# Altium PCB EMG_MainBoard_Layout.PcbDoc (part 6 of 7)
Units mm, origin at the board's own origin, x right, y up, seen from the top; angles counter-clockwise.
Board outline 59.1 x 36 mm, 6 copper layers (L1 TOP, L2 GND, L3 SIGNAL, L4 GND, L5 POWER SIGNAL, L6 BOTTOM), stack 1.146 mm thick; 231 components, 136 nets, 812 pads, 470 vias.
Unrouted connection lines stored in the file: 570.
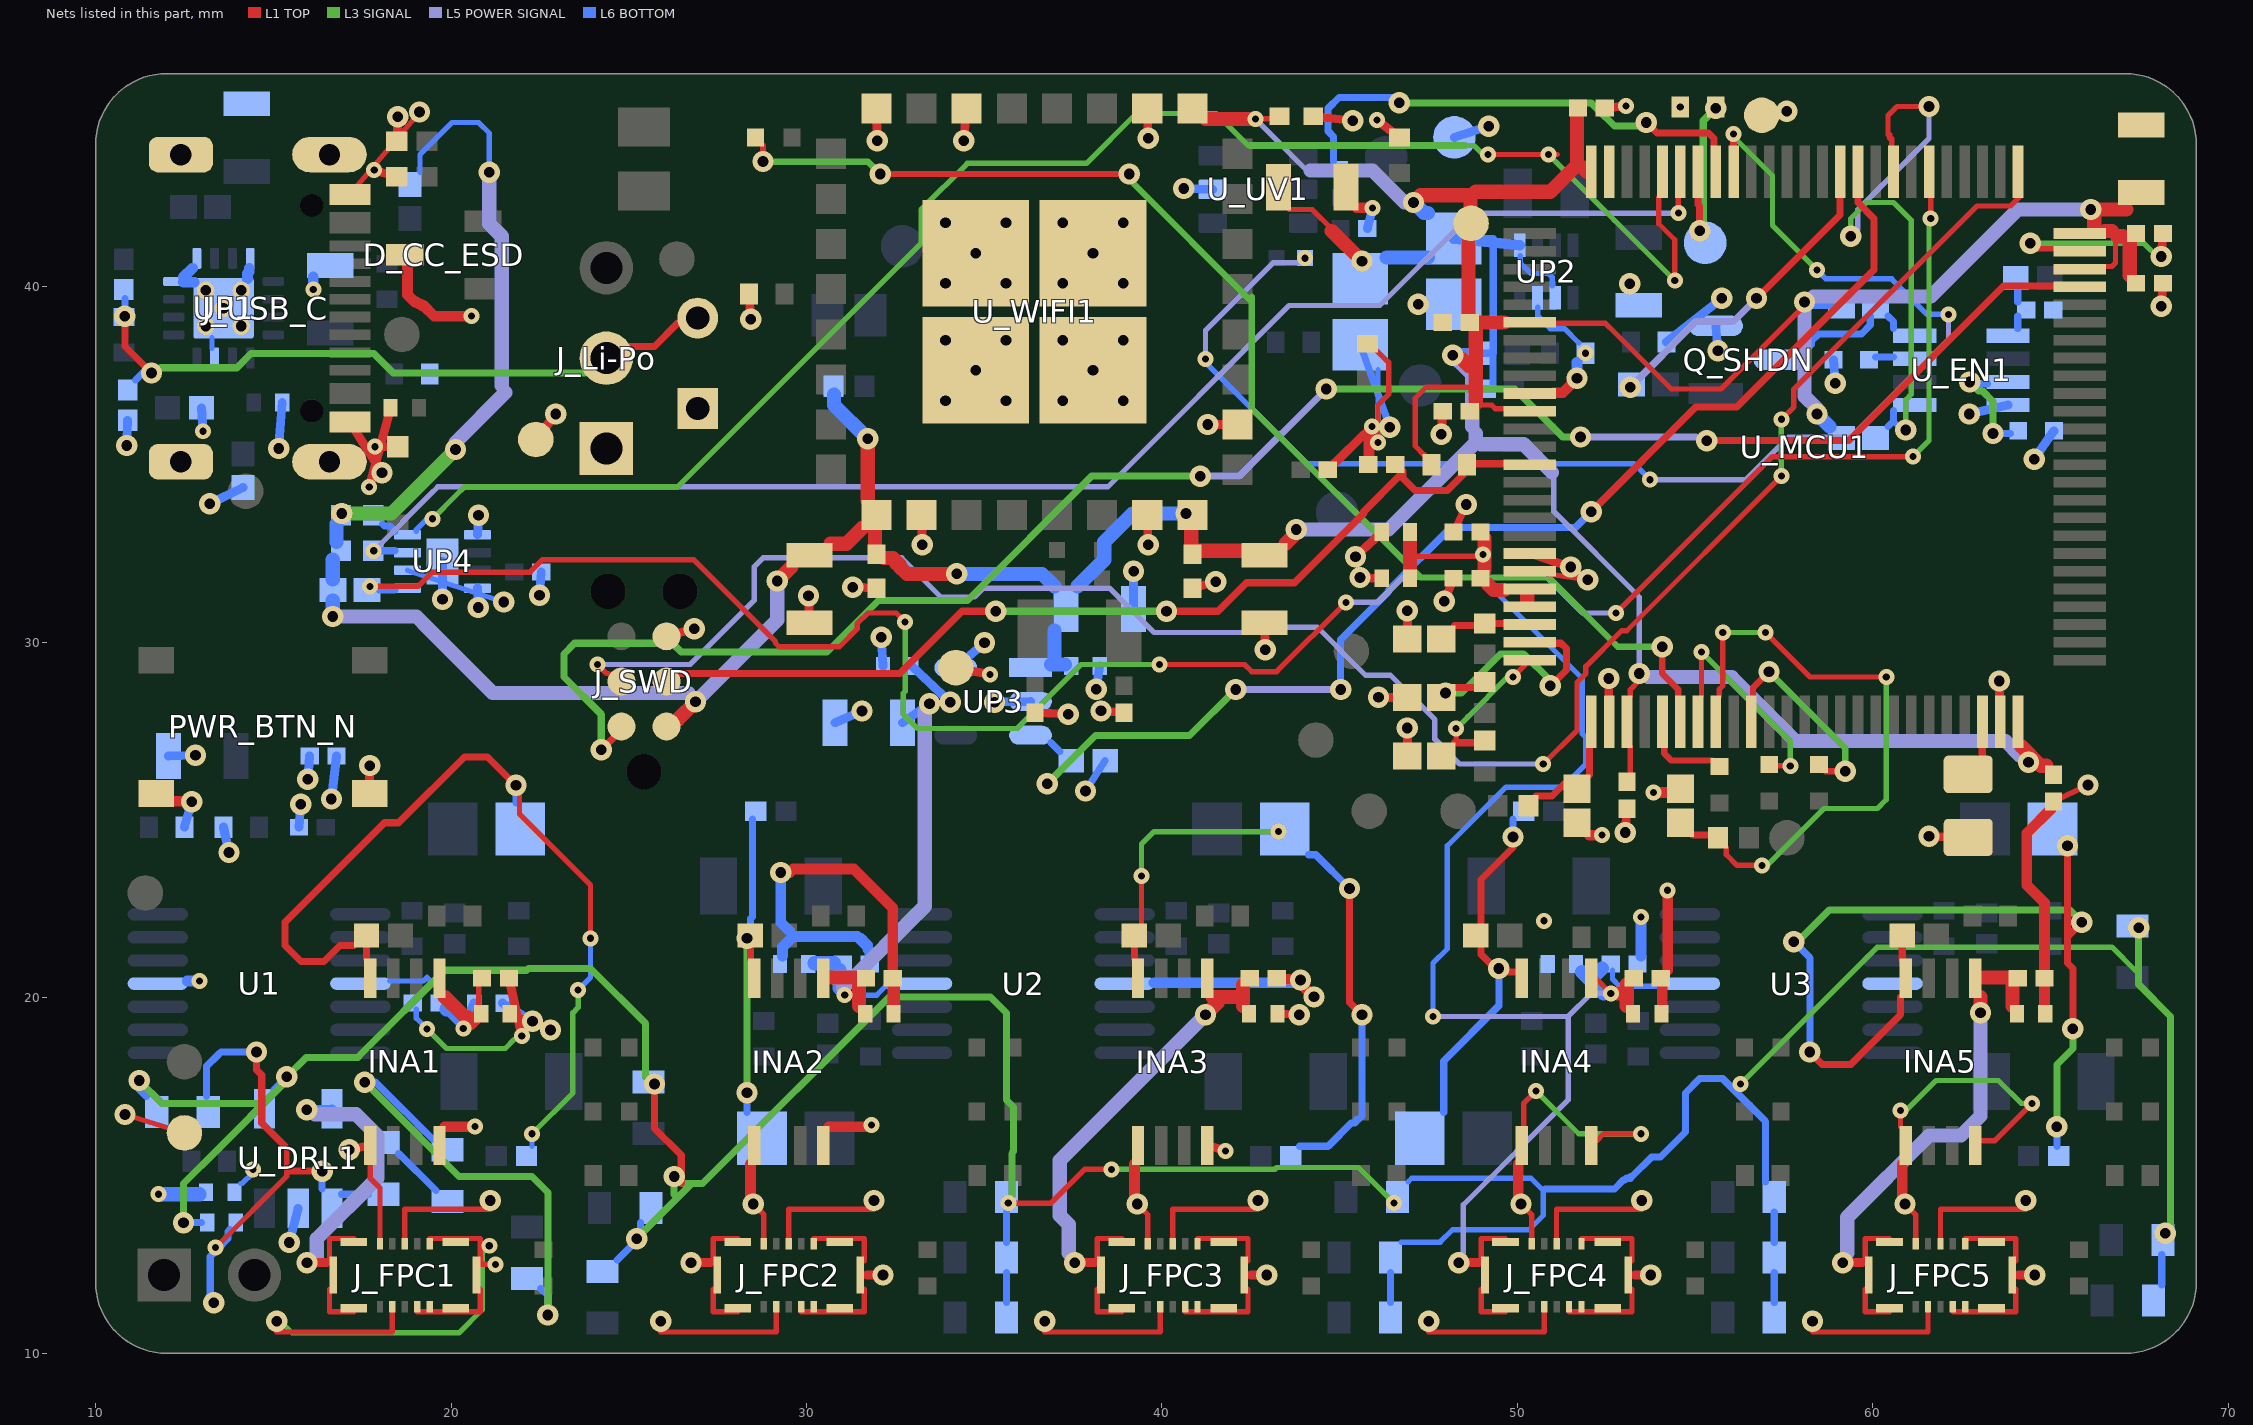
[diagram p7: the nets of this part, all layers, seen from the top]

## Via types
v1: diameter 0.6, hole 0.3, L1 TOP to L6 BOTTOM, 327 vias
v2: diameter 0.45, hole 0.2, L1 TOP to L6 BOTTOM, 138 vias
v3: diameter 0.5, hole 0.3, L1 TOP to L6 BOTTOM, 5 vias

## Nets (pads, with @x,y where several pads share a name; then routed paths per layer and width w, separated by ;. In a path a pad name is that pad's centre, name@x,y a point inside that pad or via, vN(x,y) a via of type N, cw(c..) or ccw(c..) an arc to the next point about the centre after c; other vN are vias at no path point) (continued)
DRL_SUM: (continued)
  L6 BOTTOM w0.15: R_DRL_VB3.2@46.725,13.125 47.825,13.125 48.175,13.475 50.325,13.475 50.725,13.875 50.725,14.575 50.375,14.925 47.025,14.925 R_DRL_VC3.2@46.925,14.825 ; v2@56.175,17.475 v2(56.275,17.575)
  L6 BOTTOM w0.2: v1(11.225,17.675) 11.225,17.425 R_DRL_FB.1@11.425,17.225 ; v1(12.475,13.675) C_DRL_FB.1@12.975,13.675 ; U_DRL1.4@15.025,17.425 v1(15.375,17.775) ; R_DRL_VA1.2@24.675,12.625 25.325,13.275 R_DRL_VB1.2@25.325,13.675 ; R_DRL_VA2.2@35.625,11.425 R_DRL_VB2.2@35.625,12.275 ; R_DRL_VB2.2@35.625,13.125 R_DRL_VC2.2@35.625,13.975 ; R_DRL_VA3.2@46.425,11.425 R_DRL_VB3.2@46.425,12.275 ; 50.775,14.625 52.725,14.625 52.975,14.875 53.025,14.875 53.075,14.925 53.175,14.925 53.175,14.975 53.225,14.975 53.775,15.525 54.025,15.525 54.725,16.225 54.725,17.325 55.125,17.725 55.775,17.725 56.975,16.525 R_DRL_VC4.2@56.975,14.825 ; R_DRL_VA4.2@57.225,11.425 R_DRL_VB4.2@57.225,12.275 ; R_DRL_VB4.2@57.225,13.125 R_DRL_VC4.2@57.225,13.975 ; R_DRL_VA5.2@68.125,11.925 R_DRL_VB5.2@68.125,12.775
FG_ALRT: R_AL.1 U_MCU1.81 UP4.5 | length 60.3
  L1 TOP w0.15: v2(17.725,31.575) 19.075,31.575 19.475,31.975 22.125,31.975 22.225,31.975 22.575,32.325 26.825,32.325 29.125,30.025 29.125,29.975 29.225,29.875 30.925,29.875 31.425,30.375 31.425,30.525 31.725,30.825 32.525,30.825 v2(32.775,30.575) ; v2(39.925,29.375) 42.325,29.375 42.525,29.175 43.225,29.175 v2(45.175,31.125) ; v2(52.775,30.825) 57.175,35.225 v2(61.125,35.225) ; v2(61.625,41.925) U_MCU1.81@61.625,42.525
  L3 SIGNAL w0.15: v2(32.775,30.575) 32.775,28.625 32.725,28.575 32.725,27.975 33.125,27.575 35.925,27.575 37.725,29.375 v2(39.925,29.375) ; v2(61.125,35.225) 61.575,35.675 61.575,41.875 v2(61.625,41.925)
  L5 POWER SIGNAL w0.15: v2(45.175,31.125) 46.075,31.125 46.775,31.825 48.605,31.825 50.825,31.825 51.825,30.825 v2(52.775,30.825)
  L6 BOTTOM w0.2: R_AL.1@17.975,31.475 UP4.5@18.425,31.475
GND: C1_EN1.1 C1_MCU.2 C2_EN1.2 C2_MCU.1 C3_EN1.1 C3_MCU.2 C4_MCU.1 C_ADC1.2 C_ADC2.2 C_ADC3.2 C_ADC4.2 C_ADC5.2 C_BAT.2 C_DRL_DEC.2 C_IN_.2 C_MCU_BULK.2 C_MCU_VDD1.1 C_MCU_VDD2.1 C_MCU_VDD3.1 C_MCU_VDD4.2 C_MCU_VDD5.2 C_NRST.2 C_OUT_.2 C_UV_BYPASS.2 C_VBAT.1 C_VBUS.1 C_VDDUSB.2 C_WIFI_BULK.1 C_WIFI_EN.2 C_WIFI_VDD33.2 C_WIFI_VDD33_HF.2 C_WIFI_VDDIO1.1 C_WIFI_VDDIO1_HF.2 C_WIFI_VDDIO2.1 C_WIFI_VDDIO2_HF.1 C_WIFI_X32_IN.1 C_WIFI_X32_OUT.1 CCU1.2 CCU2.1 CCU3.1 CCU4.2 CCU5.1 CCU6.2 CCU7.1 CCU8.2 CCU9.1 CCU10.2 Cdiv.1 Cdiv_1.1 Cdiv_10uF.1 CU6_1.1 CU_11.1 CU_12.1 CU_14.1 CU_21.2 CU_22.2 CU_24.2 CUP4.2 CUP4_1.2 CUP5_1.2 CUP5_2.1 CUP5_3.1 CUP5_5.2 D_CC_ESD.3 D_VBUS.2 INA1.1 INA1.4 INA2.1 INA2.4 INA3.1 INA3.4 INA4.1 INA4.4 INA5.1 INA5.4 J_FPC1.1 J_FPC1.3 J_FPC1.5 J_FPC1.7 J_FPC1.9 J_FPC1.10 J_FPC1.P2_1 J_FPC1.P2_2 J_FPC1.P2_3 J_FPC2.1 J_FPC2.3 J_FPC2.5 J_FPC2.7 J_FPC2.9 J_FPC2.10 J_FPC2.P2_1 J_FPC2.P2_2 J_FPC2.P2_3 J_FPC3.1 J_FPC3.3 J_FPC3.5 J_FPC3.7 J_FPC3.9 J_FPC3.10 J_FPC3.P2_1 J_FPC3.P2_2 J_FPC3.P2_3 J_FPC4.1 J_FPC4.3 J_FPC4.5 J_FPC4.7 J_FPC4.9 J_FPC4.10 J_FPC4.P2_1 J_FPC4.P2_2 J_FPC4.P2_3 J_FPC5.1 J_FPC5.3 J_FPC5.5 J_FPC5.7 J_FPC5.9 J_FPC5.10 J_FPC5.P2_1 J_FPC5.P2_2 J_FPC5.P2_3 J_Li-Po.1 J_SWD.3 J_USB_C.A1_B12 J_USB_C.B1_A12 J_USB_C.SH1 J_USB_C.SH2 J_USB_C.SH3 J_USB_C.SH4 MCU_VCAP.1 pad.TP_GND_ANA pad.TP_GND_DIG pad.TP_GND_PWR PWR_BTN_N.C PWR_BTN_N.D Q_SHDN.2 R_EN_PD.2 R_LIM.1 R_MCU_BOOT0_PD.1 R_SHDN_PD.1 R_TH_BAT.1 R_TMR.1 R_TS_BOTTOM.1 R_WIFI_BOOT_PD.1 R_WIFI_CS_PD.2 R_WIFI_EN_PD.2 RISET.2 RJ1.1 RJ2.1 RUP_4.1 RV1.2 TP_GND.TP U1.11 U2.11 U3.11 U_DRL1.2 U_EN1.4 U_MCU1.10 U_MCU1.19 U_MCU1.20 U_MCU1.27 U_MCU1.49 U_MCU1.74 U_MCU1.99 U_UV1.2 U_WIFI1.10 U_WIFI1.15 U_WIFI1.18 U_WIFI1.26 U_WIFI1.30 U_WIFI1.32 U_WIFI1.33 U_WIFI1.34 U_WIFI1.35 U_WIFI1.36 UP1.4 UP1.5 UP1.8 UP1.15 UP1.17@13.6,39.4 UP2.7 UP3.2 UP4.1 UP4.4 UP4.6 UP4.9 | length 226.7
  L1 TOP w0.15: v1(10.826,16.717) pad.TP_GND_ANA@12.5,16.2 ; v1(15.1,10.9) 15.1,10.6 18.35,10.6 J_FPC1.7@18.35,11.17 ; J_USB_C.A1_B12@17.155,42.6 v1(19.113,44.917) ; INA1.1@17.725,15.35 17.725,14.925 18,14.65 J_FPC1.1@18,13.23 ; J_FPC1.3@18.7,13.23 18.7,14.05 21.1,14.05 v1(21.1,14.3) ; J_FPC1.9@19.05,11.17 20.135,11.17 20.82,11.17 J_FPC1.P2_2@20.82,11.8 ; J_FPC1.5@19.4,13.23 20.135,13.23 20.82,13.23 J_FPC1.P2_2@20.82,12.6 ; J_FPC1.P2_2@20.82,12.5 v2(21.255,12.5) ; v1(25.9,10.9) 25.9,10.6 29.15,10.6 J_FPC2.7@29.15,11.17 ; v1(28.5,14.2) 28.8,13.9 J_FPC2.1@28.8,13.23 ; J_FPC2.3@29.5,13.23 29.5,14.05 31.9,14.05 v1(31.9,14.3) ; J_FPC2.9@29.85,11.17 30.935,11.17 31.62,11.17 J_FPC2.P2_2@31.62,11.8 ; J_FPC2.5@30.2,13.23 30.935,13.23 31.62,13.23 J_FPC2.P2_2@31.62,12.6 ; v1(36.7,10.9) 36.7,10.6 39.95,10.6 J_FPC3.7@39.95,11.17 ; v1(39.3,14.2) 39.6,13.9 J_FPC3.1@39.6,13.23 ; J_FPC3.3@40.3,13.23 40.3,14.05 42.7,14.05 v1(42.7,14.3) ; J_FPC3.9@40.65,11.17 41.735,11.17 42.42,11.17 J_FPC3.P2_2@42.42,11.8 ; J_FPC3.5@41,13.23 41.735,13.23 42.42,13.23 J_FPC3.P2_2@42.42,12.6 ; R_WIFI_EN_PD.2@46.025,38.225 46.375,37.875 46.375,36.975 46.075,36.675 v2(46.075,35.625) ; v1(47.5,10.9) 47.5,10.6 50.75,10.6 J_FPC4.7@50.75,11.17 ; v1(50.1,14.2) 50.4,13.9 J_FPC4.1@50.4,13.23 ; INA4.1@50.175,16.375 50.175,17.025 v2(50.525,17.375) ; U_MCU1.20@50.342,32 v1(51.977,31.757) ; J_FPC4.3@51.1,13.23 51.1,14.05 53.5,14.05 v1(53.5,14.3) ; J_FPC4.9@51.45,11.17 52.535,11.17 53.22,11.17 J_FPC4.P2_2@53.22,11.8 ; J_FPC4.5@51.8,13.23 52.535,13.23 53.22,13.23 J_FPC4.P2_2@53.22,12.6 ; INA4.4@52.225,15.975 52.425,16.175 v2(53.475,16.175) ; v1(58.3,10.9) 58.3,10.6 61.55,10.6 J_FPC5.7@61.55,11.17 ; INA5.1@60.775,16.375 v2(60.775,16.825) ; v1(60.9,14.2) 61.2,13.9 J_FPC5.1@61.2,13.23 ; J_FPC5.3@61.9,13.23 61.9,14.05 64.3,14.05 v1(64.3,14.3) ; J_FPC5.9@62.25,11.17 63.335,11.17 64.02,11.17 J_FPC5.P2_2@64.02,11.8 ; J_FPC5.5@62.6,13.23 63.335,13.23 64.02,13.23 J_FPC5.P2_2@64.02,12.6 ; INA5.4@63.025,15.975 63.425,15.975 v2(64.475,17.025) ; v1(64.425,41.225) 64.575,41.075 U_MCU1.74@65.125,41.075 ; C_MCU_VDD3.1@65.08,25.521 v1(66.049,25.984)
  L1 TOP w0.2: C1_MCU.2@48.201,33.1 v1(48.556,33.879)
  L1 TOP w0.25: v1(17.138,15.723) INA1.1@17.725,15.85 ; J_USB_C.B1_A12@17.155,36.2 v1(18.06,34.766) ; v2(17.698,34.369) C_VBUS.1@18.3,36.6 ; PWR_BTN_N.D@17.71,25.746 v1(17.711,26.533) ; v2(17.838,43.283) RJ1.1@18.475,43.1 ; v2(17.863,35.503) D_VBUS.2@18.5,35.5 ; RJ2.1@18.475,44.1 v1(18.501,44.787) ; CCU1.2@21.629,20.55 v2(21.989,18.927) ; CCU2.1@21.65,19.55 v1(22.799,19.095) ; pad.TP_GND_PWR@22.385,35.705 v1(22.945,36.424) ; J_SWD.3@26.063,30.17 v1(26.839,30.384) ; R_WIFI_BOOT_PD.1@28.38,39.8 v1(28.43,39.088) ; v1(30.055,31.312) C_WIFI_VDDIO1.1@30.08,30.55 ; v1(31.303,31.551) C_WIFI_VDDIO1_HF.2@31.965,31.525 ; 31.7,12.2 v1(32.15,12.2) ; U_WIFI1.32@31.965,45.016 v1(31.986,44.111) ; U_WIFI1.10@33.235,33.584 v1(33.259,32.748) ; v1(34.424,44.111) U_WIFI1.30@34.505,45.016 ; C_WIFI_X32_OUT.1@36.43,28.021 v1(37.358,27.976) ; v1(38.282,28.071) C_WIFI_X32_IN.1@38.93,28.021 ; U_WIFI1.15@39.585,33.584 v1(39.609,32.748) ; U_WIFI1.26@39.585,45.016 v1(39.609,44.181) ; C_WIFI_VDD33_HF.2@40.855,31.525 v1(41.517,31.703) ; INA3.4@41.275,15.85 v2(41.792,15.692) ; v1(41.29,36.126) U_WIFI1.18@42.126,36.125 ; 42.5,12.2 v1(42.95,12.2) ; C_WIFI_VDD33.2@42.88,30.55 v1(42.905,29.788) ; CCU6.2@43.229,20.55 v1(43.898,20.501) ; CCU5.1@43.25,19.55 v1(43.862,19.524) ; C_WIFI_VDDIO2_HF.1@44.255,44.8 v1(45.362,44.671) ; C_WIFI_EN.2@44.659,34.855 v2(45.906,36.07) ; v1(45.445,32.404) C2_MCU.1@46.18,33.1 ; v1(45.568,31.826) C4_MCU.1@46.18,31.8 ; v2(46.048,44.693) R_WIFI_CS_PD.2@46.68,44.2 ; v1(46.089,28.451) C_ADC2.2@46.903,28.45 ; C_ADC3.2@46.903,26.8 v1(46.904,27.591) ; C_ADC1.2@46.903,30.1 v1(46.904,30.891) ; v1(47.852,35.852) C_MCU_VDD1.1@47.901,36.5 ; v1(47.945,31.153) C3_MCU.2@48.201,31.8 ; U_MCU1.19@50.342,32.5 v1(51.502,32.119) ; C_MCU_VDD5.2@52.459,45.03 v2(53.053,45.088) ; v1(52.568,28.981) U_MCU1.27@52.58,27.762 ; v1(53.031,24.652) C_MCU_VDD2.1@53.08,25.321 ; 53.3,12.2 v1(53.75,12.2) ; pad.TP_GND_DIG@56.671,44.829 v1(57.576,44.941) ; v1(61.578,24.543) MCU_VCAP.1@62.68,24.512 ; v1(63.549,28.911) U_MCU1.49@63.58,27.762 ; 64.1,12.2 v1(64.55,12.2) ; v1(68.109,39.452) C_VDDUSB.2@68.159,40.1 ; v1(68.109,40.852) C_MCU_VDD4.2@68.159,41.5
  L1 TOP w0.3: PWR_BTN_N.C@12.175,25.525 v1@12.425,25.525 ; D_CC_ESD.3@18.775,40.625 18.775,39.775 18.975,39.575 19.025,39.575 19.075,39.525 19.125,39.525 19.175,39.475 19.225,39.475 19.525,39.175 v2(20.575,39.175) ; INA1.4@19.825,16.375 v2(20.675,16.375) ; v1@28.425,14.475 INA2.1@28.425,15.325 ; v1(29.275,23.525) 29.525,23.525 29.625,23.625 31.325,23.625 32.425,22.525 CCU3.1@32.425,19.775 ; INA2.4@30.625,16.375 31.775,16.375 v2(31.825,16.425) ; CCU3.1@32.475,19.775 CCU4.2@32.475,20.375 ; v1@39.225,14.475 INA3.1@39.225,15.325 ; CCU6.2@43.425,20.525 43.775,20.525 v1(44.275,20.025) ; C_WIFI_VDDIO2.1@45.475,42.225 v2@45.725,42.225 ; C_NRST.2@45.825,35.225 v2@45.825,35.875 ; v1@50.025,14.475 INA4.1@50.025,15.325 ; U_MCU1.10@51.025,37.025 51.275,37.025 v1(51.675,37.425) ; C_ADC4.2@52.025,24.575 v2(52.375,24.575) ; v2(53.825,25.775) C_ADC5.2@54.225,25.775 ; CCU7.1@54.075,19.775 CCU8.2@54.075,20.375 ; CCU8.2@54.225,20.775 v2(54.225,23.025) ; v1@60.825,14.475 INA5.1@60.825,15.325 ; CCU10.2@64.825,20.375 64.825,19.775 64.825,22.675 64.325,23.175 64.325,24.625 C_MCU_VDD3.1@65.025,25.325
  L3 SIGNAL w0.15: v1@15.325,10.775 15.525,10.575 20.225,10.575 20.875,11.225 20.875,12.825 v2(21.075,13.025) ; v2(19.325,19.125) 19.875,18.575 21.525,18.575 21.775,18.825 ; v2(50.525,17.375) 51.725,16.175 v2(53.475,16.175) ; v2(60.775,16.825) 60.925,16.825 61.775,17.675 63.525,17.675 64.175,17.025 v2(64.475,17.025) ; v1(64.425,41.225) 67.556,41.225 67.625,41.225 67.825,41.025
  L6 BOTTOM w0.15: UP1.15@13.275,38.275 UP1.17@13.275,38.575 ; C_DRL_DEC.2@14.075,14.775 14.125,14.775 14.425,15.075 v2(14.425,15.175) ; UP4.6@18.775,32.025 v1(21.481,31.135) ; CU_11.1@19.025,19.675 19.025,19.425 v2(19.325,19.125) ; v2(46.075,35.625) C_WIFI_BULK.1@46.075,37.675 ; UP2.7@50.575,39.425 50.575,39.175 50.925,38.825 51.325,38.825 RUP_4.1@51.725,38.425
  L6 BOTTOM w0.2: v1(37.846,25.817) R_EN_PD.2@38.401,26.668 ; C_WIFI_BULK.1@45.58,38.374 v1(46.411,36.048)
  L6 BOTTOM w0.25: v1(10.877,35.536) R_TS_BOTTOM.1@10.903,36.248 ; Cdiv_10uF.1@12.05,26.8 v1(12.812,26.825) ; RV1.2@12.5,24.8 v1(12.705,25.512) ; RISET.2@12.979,36.6 v2(13.027,35.938) ; v1(13.213,33.898) R_TMR.1@14.15,34.353 ; v1(15.149,35.453) C_IN_.2@15.25,36.75 ; v1(15.446,13.118) U_DRL1.2@15.7,14.08 ; Cdiv_1.1@15.721,24.8 v1(15.771,25.448) ; v1(15.972,26.152) Cdiv.1@16.021,26.8 ; v1(19.759,31.213) UP4.9@19.76,32.275 ; UP4.4@20.745,31.525 v1(20.77,30.978) ; UP4.1@20.745,33.025 v1(20.772,33.572) ; CU_21.2@21.45,19.85 v1(22.291,19.342) ; v1(22.489,31.327) CU6_1.1@22.539,31.975 ; CUP5_3.1@30.8,27.738 v1(31.561,28.067) ; v1(32.102,30.14) CUP5_2.1@32.15,29.338 ; v1(35.286,28.318) UP3.2@36.3,28.337 ; v1(38.147,28.676) CUP5_1.2@38.25,29.338 ; CUP5_5.2@39.2,30.937 v1(39.201,31.999) ; v1(40.611,42.768) U_UV1.2@41.423,42.742 ; C_UV_BYPASS.2@45.777,41.642 v2(45.924,42.215) ; TP_GND.TP@48.226,44.205 v1(49.188,44.517) ; R_SHDN_PD.1@54.19,38.45 v1(55.744,39.678) ; Q_SHDN.2@55.58,38.9 v1(55.641,38.199) ; C3_EN1.1@58.89,37.95 v1(58.94,37.288) ; v1(62.711,36.422) U_EN1.4@63.8,36.675 ; v1(64.541,35.155) C2_EN1.2@65.09,35.95
  L6 BOTTOM w0.3: U1.11@12.575,20.475 v2(12.925,20.475) ; UP1.17@14.275,40.225 14.275,40.375 14.325,40.425 UP1.8@14.325,40.525 ; v2(16.125,39.925) C_OUT_.2@16.125,40.275 ; v1(29.275,23.525) 29.275,22.125 29.525,21.875 ; CU_22.2@29.325,21.175 29.325,21.425 29.625,21.725 31.425,21.725 31.475,21.675 31.525,21.675 31.525,21.625 31.575,21.625 31.575,21.575 31.625,21.575 31.625,21.525 31.675,21.525 31.675,21.475 31.725,21.475 31.725,21.375 31.775,21.325 CU_12.1@31.775,21.175 ; U2.11@39.775,20.425 43.875,20.425 v1(44.275,20.025) ; v1(51.675,37.425) RUP_4.1@51.675,37.875 ; CU_14.1@53.475,21.175 v2(53.475,22.275) ; UP1.4@12.475,40.125 UP1.17@12.775,40.125 ; UP1.4@12.475,40.125 UP1.17@12.775,40.125 ; UP1.4@12.475,40.125 UP1.17@12.775,40.125 ; 12.475,40.275 12.725,40.525 12.475,40.275
  other v1: 33.91,36.8 35.61,36.8 37.21,36.8 38.91,36.8 34.76,37.65 38.06,37.65 33.91,38.5 35.61,38.5 37.21,38.5 38.91,38.5 47.212,39.508 53.163,40.084 33.91,40.1 35.61,40.1 37.21,40.1 38.91,40.1 34.76,40.95 38.06,40.95 33.91,41.8 35.61,41.8 37.21,41.8 38.91,41.8
  other v2: 50.75,22.167 51.912,38.134 54.58,45.06
  other v3: 13.1,38.9 14.1,38.9 13.6,39.4 13.1,39.9 14.1,39.9
I2C_SCL: R_SCL.1 U_MCU1.95 UP4.7 | length 41.4
  L1 TOP w0.15: v2(54.525,42.075) U_MCU1.95@54.525,42.525
  L5 POWER SIGNAL w0.15: v2(17.825,32.575) 19.41,34.16 19.625,34.375 38.475,34.375 43.575,39.475 46.125,39.475 48.605,41.955 48.725,42.075 48.902,42.075 52.722,42.075 v2(54.525,42.075)
  L6 BOTTOM w0.2: R_SCL.1@18.075,32.575 UP4.7@18.425,32.575
I2C_SDA: R_SDA.1 U_MCU1.96 UP4.8 | length 45.9
  L1 TOP w0.15: v2(49.175,43.725) 51.125,43.725 ; U_MCU1.96@53.975,42.525 53.975,41.775 54.425,41.325 v2(54.425,40.175)
  L3 SIGNAL w0.15: v2(19.475,33.475) 20.16,34.16 20.375,34.375 26.375,34.375 33.225,41.225 33.225,42.175 34.525,43.475 37.875,43.475 39.275,44.875 41.525,44.875 42.425,43.975 ; 48.605,43.975 48.775,43.975 49.025,43.725 v2(49.175,43.725) ; v2(50.875,43.725) 52.102,42.499 52.722,41.878 v2(54.425,40.175)
  L3 SIGNAL w0.2: 42.475,43.975 48.525,43.975
  L6 BOTTOM w0.15: UP4.8@19.025,33.125 19.025,33.175 19.325,33.475 v2(19.475,33.475)
  L6 BOTTOM w0.2: R_SDA.1@18.075,33.325 18.125,33.275 18.275,33.275 UP4.8@18.425,33.125
INA_OUT_1: CL_1.2 INA1.8 RH_1.1 Rservo_1.2 | length 24
  L1 TOP w0.15: v1@21.925,25.725 21.925,25.175 23.925,23.175 v2(23.925,21.675)
  L1 TOP w0.2: RH_1.1@17.275,21.475 16.875,21.475 16.425,21.025 15.775,21.025 15.325,21.475 15.325,22.125 18.125,24.925 18.525,24.925 20.375,26.775 21.025,26.775 v1(21.825,25.975) ; INA1.8@17.625,21.075 RH_1.1@17.625,21.475
  L3 SIGNAL w0.15: v2(22.275,16.175) 23.425,17.325 23.425,19.575 23.575,19.725 v2(23.575,20.225)
  L6 BOTTOM w0.15: 22.275,15.825 v2(22.275,16.175) ; v2(23.575,20.225) 23.925,20.575 v2(23.925,21.675)
  L6 BOTTOM w0.2: CL_1.2@21.825,25.475 v1(21.825,25.975)
INA_OUT_2: CL_2.2 INA2.8 RH_2.1 Rservo_2.2 | length 8.4
  L1 TOP w0.2: INA2.8@28.425,21.075 RH_2.1@28.425,21.475
  L3 SIGNAL w0.2: v1(28.325,17.325) v1(28.325,21.675)
  L6 BOTTOM w0.2: CL_2.2@28.325,16.775 v1(28.325,17.325) ; 28.425,21.975 28.425,22.225 28.475,22.275 Rservo_2.2@28.475,25.025
INA_OUT_3: CL_3.2 INA3.8 RH_3.1 Rservo_3.2 | length 16.9
  L1 TOP w0.15: RH_3.1@39.425,22.075 v2(39.425,23.425)
  L1 TOP w0.2: INA3.8@39.225,21.075 RH_3.1@39.225,21.475 ; v1(45.275,23.075) 45.275,19.875 v1(45.625,19.525)
  L3 SIGNAL w0.15: v2(39.425,23.425) 39.425,24.325 39.775,24.675 v2(43.275,24.675)
  L6 BOTTOM w0.2: 43.875,15.825 44.675,15.825 45.325,16.475 45.425,16.475 45.425,16.525 45.475,16.525 45.475,16.575 45.525,16.575 45.625,16.675 v1(45.625,19.525) ; CL_3.2@44.125,24.025 44.325,24.025 v1(45.275,23.075)
INA_OUT_4: CL_4.2 INA4.8 RH_4.1 Rservo_4.2 | length 9.8
  L1 TOP w0.2: v1(49.475,20.825) 49.375,20.825 48.975,21.225 48.975,23.325 49.875,24.225 v1(49.875,24.525) ; v1@49.725,20.725 INA4.8@49.975,20.725
  L6 BOTTOM w0.2: CL_4.2@47.925,16.775 47.925,18.225 49.475,19.775 v1(49.475,20.825) ; v1(49.875,24.525) 49.875,25.025
INA_OUT_5: CL_5.2 INA5.8 RH_5.1 Rservo_5.2 | length 25.3
  L1 TOP w0.2: v1(58.225,18.475) 58.575,18.125 59.375,18.125 60.775,19.525 INA5.8@60.775,20.025 ; INA5.8@60.825,21.075 RH_5.1@60.825,21.475 ; v1(65.475,24.275) 65.475,20.975 65.625,20.825 v1(65.625,19.125) ; 65.525,21.775 v1(65.875,22.125)
  L3 SIGNAL w0.2: v1(57.775,21.575) 57.875,21.575 58.775,22.475 65.525,22.475 v1(65.875,22.125) ; v1(65.175,16.375) 65.175,18.125 65.625,18.575 v1(65.625,19.125)
  L6 BOTTOM w0.2: v1(57.775,21.575) 58.225,21.125 v1(58.225,18.475) ; 65.175,15.825 v1(65.175,16.375)
KILL_CTRL: Q_SHDN.3 R_KILL_PU.1 U_EN1.8 | length 2.8
  L6 BOTTOM w0.2: 58.125,38.225 58.275,38.375 58.275,38.475 58.475,38.675 59.675,38.675 59.925,38.925 R_KILL_PU.1@59.925,39.175 ; R_KILL_PU.1@60.425,39.175 60.575,39.025 U_EN1.8@60.575,38.825
MCU_BOOT0: R_MCU_BOOT0_PD.2 TP_MCU_BOOT0.TP U_MCU1.94 | length 4.3
  L1 TOP w0.2: U_MCU1.94@55.075,42.525 55.075,42.325 55.125,42.275 v1(55.125,41.575)
  L3 SIGNAL w0.2: 55.225,41.875 55.225,44.675 55.525,44.976 v1(55.575,45.025)
MCU_NRST: C_NRST.1 J_SWD.5 R_NRST.1 U_MCU1.14 | length 25.7
  L1 TOP w0.2: J_SWD.5@26.375,29.125 32.625,29.125 34.375,30.875 v1(35.325,30.875) ; v1(40.125,30.875) 41.575,30.875 42.375,31.675 43.725,31.675 45.675,33.625 45.675,33.675 46.675,34.675 ; C_NRST.1@46.775,34.825 46.775,34.625 47.125,34.275 48.025,34.275 R_NRST.1@48.475,34.725 ; R_NRST.1@48.775,35.025 U_MCU1.14@49.625,35.025
  L3 SIGNAL w0.2: v1(35.325,30.875) v1(40.125,30.875)
MCU_PWR_INT_N: R_INT_PULLUP.2 U_EN1.5 U_MCU1.83 | length 16.2
  L1 TOP w0.15: U_MCU1.83@60.525,43.975 60.525,44.175 60.475,44.175 60.475,44.275 60.425,44.275 60.425,44.825 60.575,44.976 60.675,45.075 v1(61.575,45.075)
  L3 SIGNAL w0.15: v1(59.375,41.425) 59.375,41.925 59.825,42.375 60.575,42.375 61.075,41.875 61.075,36.975 60.925,36.825 v1(60.925,35.975)
  L5 POWER SIGNAL w0.15: v1(59.375,41.425) 59.575,41.625 59.575,42.175 61.575,44.175 61.575,44.976 v1(61.575,45.075)
  L6 BOTTOM w0.15: 60.625,36.175 60.825,35.975 v1(60.925,35.975)
  L6 BOTTOM w0.2: R_INT_PULLUP.2@60.425,36.075 60.575,36.225 U_EN1.5@60.575,36.525
MCU_SHUTDOWN: R_SHDN_G.2 U_MCU1.86 | length 8.4
  L1 TOP w0.2: v1(56.725,39.675) 59.075,42.025 U_MCU1.86@59.075,42.525
  L5 POWER SIGNAL w0.2: v1(53.175,37.175) 55.025,39.025 56.075,39.025 v1(56.725,39.675)
MCU_SPI_MISO: R_SPI_MISO.2 U_MCU1.31 | length 34.5
  L1 TOP w0.18: v1(28.775,43.525) R_SPI_MISO.2@28.775,43.975 ; v1(32.075,43.175) v1(39.075,43.175) ; 54.075,29.125 54.525,28.675 U_MCU1.31@54.525,28.475 ; 54.075,29.175 v1(54.075,29.875)
  L3 SIGNAL w0.18: v1(28.775,43.525) 31.725,43.525 v1(32.075,43.175) ; v1@39.175,42.925 42.475,39.625 ; 42.525,39.725 42.525,36.575 47.275,31.825 48.605,31.825 50.875,31.825 52.825,29.875 ; 52.875,29.875 v1(54.075,29.875)
MCU_SPI_MOSI: R_SPI_MOSI.2 U_MCU1.32 | length 5.9
  L1 TOP w0.15: U_MCU1.32@55.175,28.475 v2(55.175,29.725) ; R_SPI_MOSI.2@57.275,26.525 v2(57.675,26.525)
  L3 SIGNAL w0.15: v2(55.175,29.725) 57.675,27.225 v2(57.675,26.525)
MCU_SPI_SCK: R_SPI_SCK.2 U_MCU1.30 | length 1.6
  L1 TOP w0.18: U_MCU1.30@54.125,27.075 54.125,26.875 54.325,26.675 R_SPI_SCK.2@55.475,26.675
MCU_SWCLK: J_SWD.4 U_MCU1.76 | length 54
  L1 TOP w0.15: v2(24.125,29.375) 24.375,29.125 24.425,29.125 ; v2(50.725,26.575) 51.675,27.525 51.675,28.875 51.925,29.125 51.925,29.325 52.925,30.325 53.075,30.325 v2(57.425,34.675) ; v2(57.425,36.275) 57.775,36.625 57.775,37.125 62.925,42.275 63.875,42.275 U_MCU1.76@64.125,42.525
  L3 SIGNAL w0.15: v2(57.425,34.675) v2(57.425,36.275)
  L5 POWER SIGNAL w0.15: v2(24.125,29.375) 26.725,29.375 28.525,31.175 28.525,32.125 28.775,32.375 32.675,32.375 33.775,31.275 34.725,31.275 34.975,31.525 38.525,31.525 39.775,30.275 42.375,30.275 42.525,30.425 44.375,30.425 45.725,29.075 46.425,29.075 47.675,27.825 47.675,27.275 48.375,26.575 48.605,26.575 v2(50.725,26.575)
MCU_SWDIO: J_SWD.2 U_MCU1.72 | length 50.9
  L1 TOP w0.2: v1(24.225,26.975) J_SWD.2@24.575,27.325 ; v1(55.325,35.675) 59.325,35.675 63.675,40.025 U_MCU1.72@65.125,40.025
  L3 SIGNAL w0.2: v1(24.225,26.975) 24.225,27.975 23.175,29.025 23.175,29.675 23.475,29.975 26.225,29.975 26.475,29.725 30.575,29.725 32.025,31.175 34.525,31.175 38.025,34.675 v1(41.075,34.675) ; v1(44.625,37.125) 48.605,37.125 49.925,37.125 ; 49.975,37.075 51.275,35.775 v1(51.775,35.775)
  L5 POWER SIGNAL w0.2: v1(41.075,34.675) 42.175,34.675 v1(44.625,37.125) ; v1(51.775,35.775) 55.025,35.775
MCU_VCAP: MCU_VCAP.2 U_MCU1.48 | length 0.3
  L1 TOP w0.2: MCU_VCAP.2@63.075,26.775 U_MCU1.48@63.075,27.075
MCU_WIFI_CS: R_SPI_CS.2 U_MCU1.35 | length 5.1
  L1 TOP w0.18: U_MCU1.35@56.625,28.475 56.625,28.725 v1(57.075,29.175) ; R_SPI_CS.2@58.675,26.375 v1(59.225,26.375)
  L3 SIGNAL w0.18: v1(57.075,29.175) 59.225,27.025 v1(59.225,26.375)
MCU_WIFI_UART_RX: R_WIFI_UART_RX_LINK.2 U_MCU1.93 | length 13.3
  L1 TOP w0.2: v1(53.625,44.625) 53.925,44.325 55.375,44.325 55.525,44.175 U_MCU1.93@55.525,43.975
  L3 SIGNAL w0.2: v1(46.675,45.175) 52.075,45.175 52.275,44.976 52.725,44.525 53.525,44.525 v1(53.625,44.625)
  L6 BOTTOM w0.2: R_WIFI_UART_RX_LINK.2@44.825,43.525 44.825,44.225 44.675,44.375 44.675,45.025 44.975,45.325 46.525,45.325 v1(46.675,45.175)
MCU_WIFI_UART_TX: R_WIFI_UART_TX_LINK.2 U_MCU1.92 | length 39.2
  L1 TOP w0.2: U_MCU1.92@56.08,43.238 v2(56.08,44.3)
  L3 SIGNAL w0.15: v2(56.08,44.3) 56.175,44.125 57.175,43.125 57.175,41.725 v2(58.425,40.475)
  L5 POWER SIGNAL w0.15: v2(41.225,37.975) 41.225,38.775 43.125,40.675 43.825,40.675 v2(44.026,40.805) ; v2(53.725,34.575) 56.425,34.575 57.625,35.775 59.375,35.775 62.125,38.525 v2(62.125,39.225)
  L6 BOTTOM w0.15: v2(41.225,37.975) 41.225,37.875 44.075,35.025 48.605,35.025 53.275,35.025 v2(53.725,34.575) ; v2(58.425,40.475) 58.675,40.225 60.525,40.225 61.525,39.225 v2(62.125,39.225)
NetC1_EN1_2: C1_EN1.2 R_EN1_1.2 U_EN1.1 | length 0.7
  L6 BOTTOM w0.2: U_EN1.1@64.075,38.825 C1_EN1.2@64.075,39.175 ; C1_EN1.2@64.075,39.575 R_EN1_1.2@64.075,39.975
NetC2_EN1_1: C2_EN1.1 U_EN1.3 | length 2.8
  L3 SIGNAL w0.2: v1(62.725,37.325) 62.975,37.075 63.075,37.075 63.375,36.775 v1(63.375,35.875)
  L6 BOTTOM w0.2: v1@62.725,37.275 U_EN1.3@63.225,37.275 ; v1(63.375,35.875) C2_EN1.1@63.875,35.875
NetC3_EN1_2: C3_EN1.2 U_EN1.7 | length 0.5
  L6 BOTTOM w0.2: C3_EN1.2@60.075,38.025 U_EN1.7@60.575,38.025